# EAGLE board HITB_PEK_2018_V1.2 (EAGLE 9.2.1)
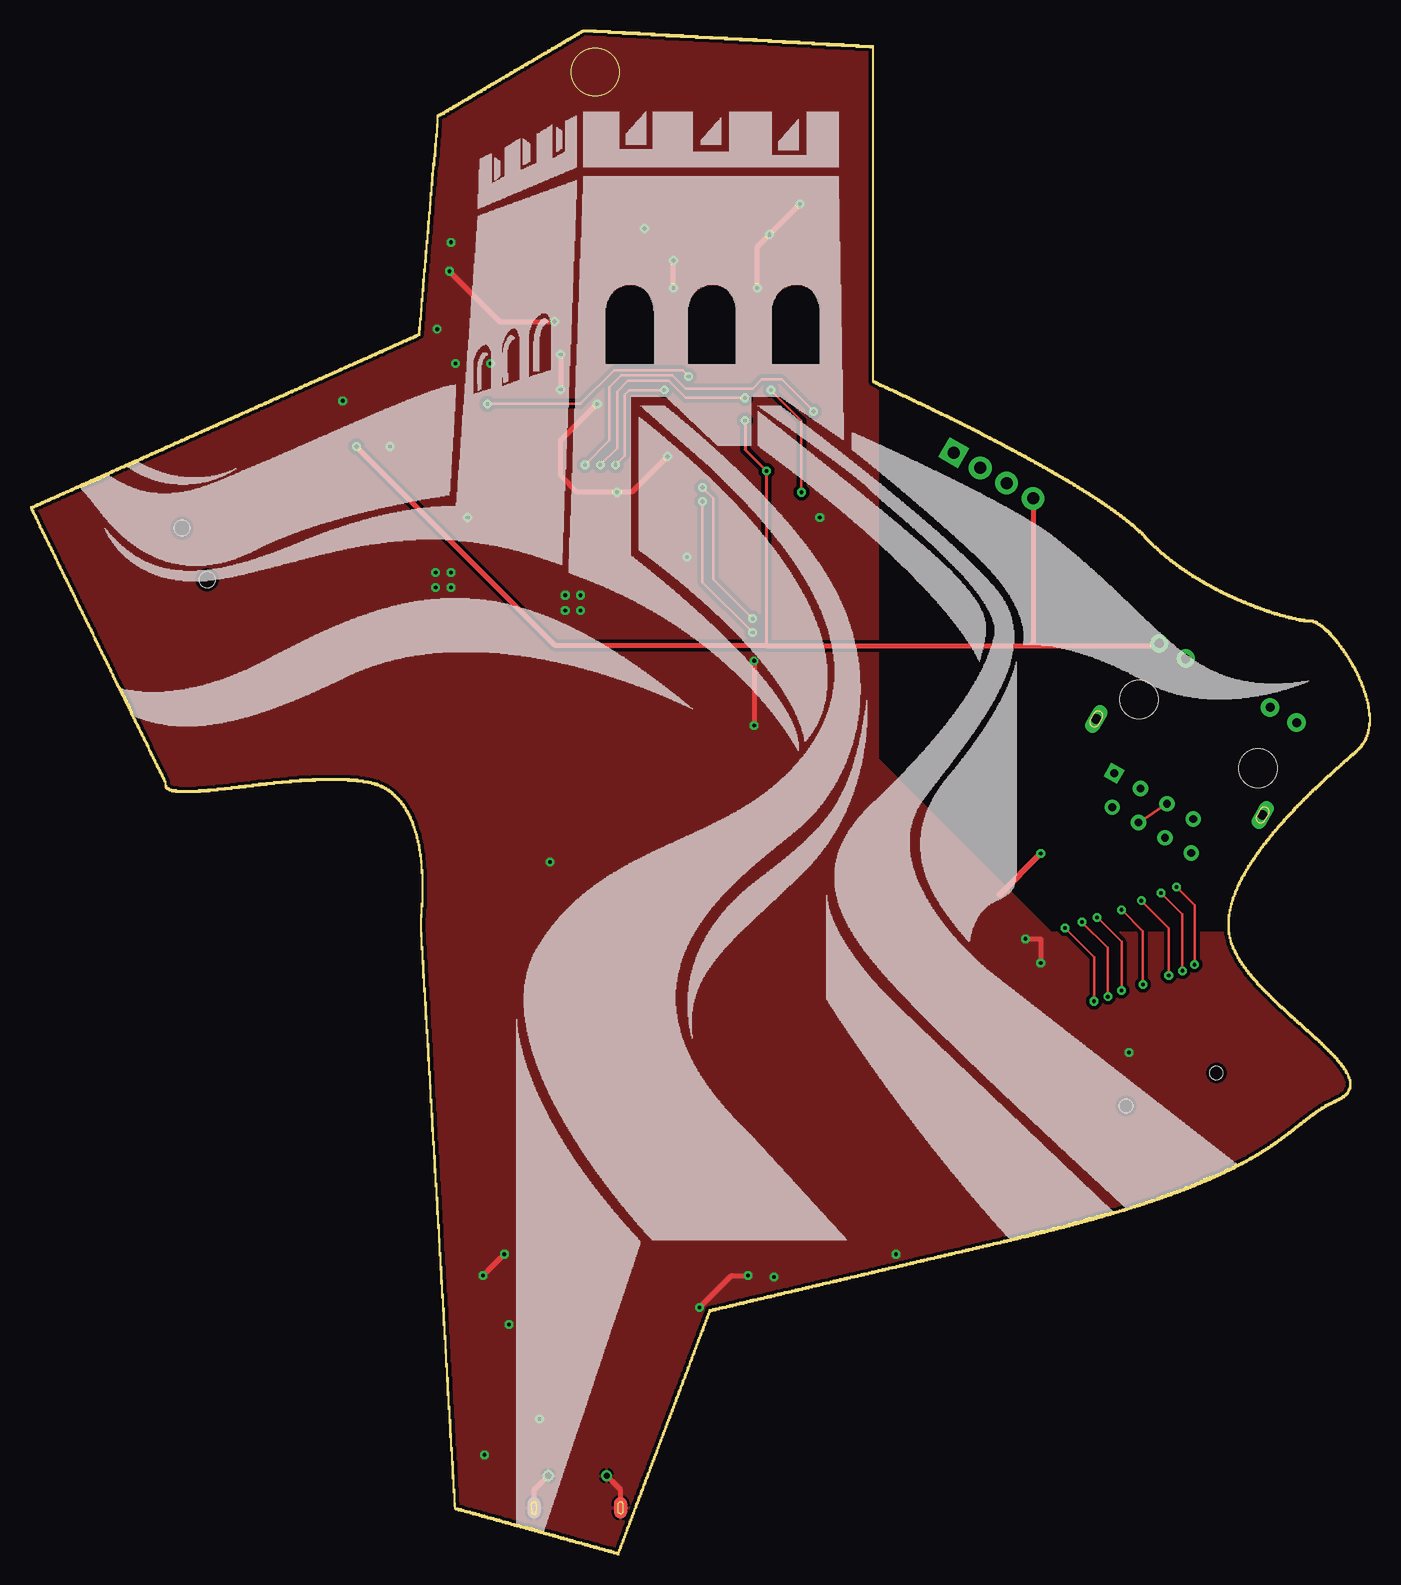
[diagram p0: board, top side]
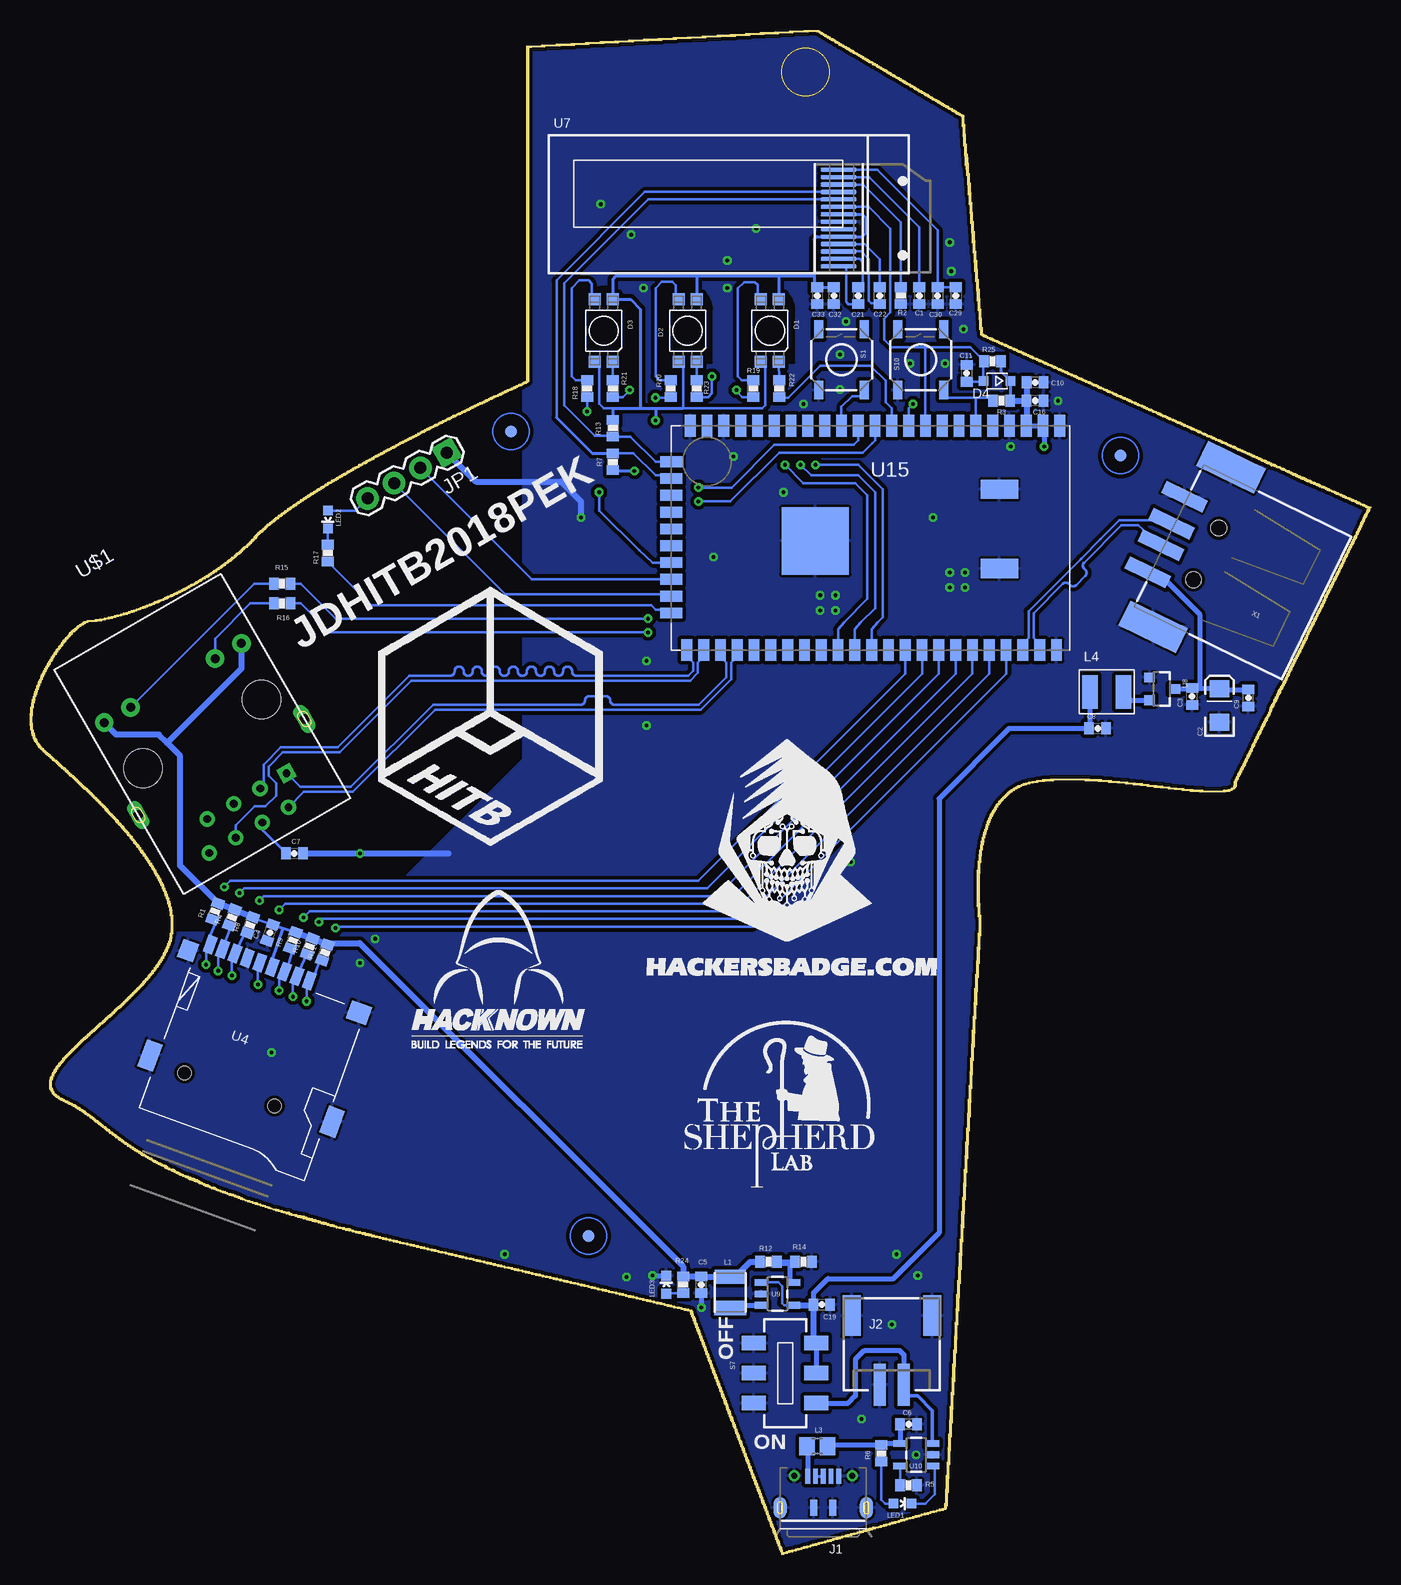
[diagram p1: board, bottom side, seen from below]

Size 111.72 x 127.05 mm. Coordinates in mm from the lower left corner, seen from the top.
Copper layers (1*16): Top 0.035mm / dielectric 1.5mm / Bottom 0.035mm
Design rules "yun": minimum track width 6mil, minimum drill 12mil, track to track 6mil, track to pad 6mil, pad to pad 6mil, via to via 6mil, smd to smd 6mil, copper to edge 10mil, drill to drill 6mil, minimum pad ring 8mil, minimum via ring 8mil, stop-mask expansion 4mil, vias tented up to drill 20mil, thermal gap 8mil
Net classes: 0 default: width 0.203 mm, clearance 0.203 mm; 1 3.3V: width 0.254 mm
Milling: area 45.1,121.5 to 49.1,125.5

## Footprints (pad centres in the part's own frame; a part is rotated, then mirrored left to right if it is on the bottom)
0603-CAP = smd 0.8 x 1: 1 -0.7,0; 2 0.7,0
EIA3216 = smd 1.4 x 1.6: A 1.4,0; C -1.4,0
LSG-T770 = smd 1 x 1: 1 0.75,-2.6; 2 0.75,2.6; 3 -0.75,2.6; 4 -0.75,-2.6
SOD-323F = smd 0.8 x 0.8: A 1.125,0; C -1.125,0
USB-MICRO-4 = smd 0.4 x 1.25: DM- 0.65,-1.835; DP+ 0,-1.835; GND -1.3,-1.835; ID -0.65,-1.835; VBUS 1.3,-1.835 | smd 0.6 x 1.35: MT1 0.8,0.815; MT2 -0.8,0.815 | smd 1.1 x 1.8: MT5 3.6,0.815; MT6 -3.6,0.815 | smd 1.1 x 1.8 bottom: MT7 -3.6,0.815; MT8 3.6,0.815 | drill 0.5: MT9 -2.425,-1.86; MT10 2.425,-1.86
PH2.0_SMD_2 = smd 1 x 3.5: 1 -1,-4; 2 1,-4 | smd 1.5 x 3.4: G1 -3.35,1.75; G2 3.35,1.75
1X04 = drill 1 pad 1.88 square: 1 0,0 | drill 1 pad 1.88: 2 2.54,0; 3 5.08,0; 4 7.62,0
1210 = smd 1.2 x 2.7: 1 -1.3,0 | smd 1.2 x 2.6: 2 1.3,0
FB805 = smd 1.3 x 1.5: 1 -0.85,0; 2 0.85,0
CD32 = smd 1.27 x 2.8: P$1 -1.4,0; P$2 1.4,0
LED-0603 = smd 0.8 x 0.8: A 0,-0.75; C 0,0.75
0603-RES = smd 0.8 x 1: 1 -0.7,0; 2 0.7,0
TACTILE_SWITCH_SMD = smd 1.524 x 0.762: 1 -2.54,1.905; 2 2.54,1.905; 3 -2.54,-1.905; 4 2.54,-1.905
MSS22D18 = smd 1.2 x 2: 1 -2.5,2.6; 2 0,2.6; 3 2.5,2.6; 4 -2.5,-2.6; 5 0,-2.6; 6 2.5,-2.6
FIDUCIA-MOUNT = smd 1.016 x 1.016: P$1 0,0
MICRO-SD-TF = smd 0.8 x 1.5: CD -6.72,4.61; CD/DAT3 0.98,4.61; CLK -2.32,4.61; CMD -0.12,4.61; DAT0 -4.52,4.61; DAT1 -5.62,4.62; DAT2 2.08,4.61; GND -3.42,4.61; VDD -1.22,4.61 | smd 1.4 x 1.6: GND1 -8.27,3.51 | smd 1.8 x 1.6: GND2 6.88,3.51 | smd 1.4 x 2.4: GND3 7.88,-5.79; GND4 -8.27,-5.79 | hole 1.1: 2.93,-6.19; -5.07,-6.19
OLED_12832_0.91_2 = smd 3 x 0.35: 1 9.15,-5.18; 2 9.15,-4.56; 3 9.15,-3.94; 4 9.15,-3.32; 5 9.15,-2.7; 6 9.15,-2.08; 7 9.15,-1.46; 8 9.15,-0.84; 9 9.15,-0.22; 10 9.15,0.4; 11 9.15,1.02; 12 9.15,1.64; 13 9.15,2.26; 14 9.15,2.88
SOT23-3 = smd 0.8 x 0.9: 1 -0.95,-1; 2 0.95,-1; 3 0,1.1
SOT23-5 = smd 1.1 x 0.55: 1 -1.35,0.95; 2 -1.35,0; 3 -1.35,-0.95; 4 1.35,-0.95; 5 1.35,0.95
MT7688_HLINK = smd 0.9 x 1.8: 1 15.78,9.35; 2 14.38,9.35; 3 12.98,9.35; 4 11.58,9.35; 5 10.18,9.35; 6 8.78,9.35; 7 7.38,9.35; 8 5.98,9.35; 9 4.58,9.35; 10 3.18,9.35; 11 1.78,9.35; 12 0.38,9.35; 13 -1.02,9.35; 14 -2.42,9.35; 15 -3.82,9.35; 16 -5.22,9.35; 17 -6.62,9.35; 18 -8.02,9.35; 19 -9.42,9.35; 20 -10.82,9.35; 21 -12.22,9.35; 22 -13.62,9.35; 23 -15.02,9.35; 34 -15.3,-9.35; 35 -13.9,-9.35; 36 -12.5,-9.35; 37 -11.1,-9.35; 38 -9.7,-9.35; 39 -8.3,-9.35; 40 -6.9,-9.35; 41 -5.5,-9.35; 42 -4.1,-9.35; 43 -2.7,-9.35; 44 -1.3,-9.35; 45 0.1,-9.35; 46 1.5,-9.35; 47 2.9,-9.35; 48 4.3,-9.35; 49 5.7,-9.35; 50 7.1,-9.35; 51 8.5,-9.35; 52 9.9,-9.35; 53 11.3,-9.35; 54 12.7,-9.35; 55 14.1,-9.35; 56 15.5,-9.35 | smd 1.8 x 0.9: 24 -16.6,6.35; 25 -16.6,4.95; 26 -16.6,3.55; 27 -16.6,2.15; 28 -16.6,0.75; 29 -16.6,-0.65; 30 -16.6,-2.05; 31 -16.6,-3.45; 32 -16.6,-4.85; 33 -16.6,-6.25 | smd 5.6 x 5.6: PAD -4.6,-0.25 | smd 3.1 x 1.6: PAD1 10.75,4.05; PAD2 10.75,-2.55
HR911105A = drill 0.65 pad 1.27 square: 1 4.445,-17.145 | drill 0.65 pad 1.27: 2 3.175,-19.685; 3 1.905,-17.145; 4 0.635,-19.685; 5 -0.635,-17.145; 6 -1.905,-19.685; 7 -3.175,-17.145; 8 -4.445,-19.685 | drill 0.75 pad 1.524: 9 6.604,-5.893; 10 4.064,-5.893; 11 -4.064,-5.893; 12 -6.604,-5.893 | drill 0.8 pad 1.27 long: 13 8.001,-13.97; 14 -8.001,-13.97 | hole 3.2: 5.715,-10.795; -5.715,-10.795
USB-A-6 = smd 1.1 x 3.8: DM- -1,2.4; DP+ 1,2.4; GND 3.5,2.4; VBUS -3.5,2.4 | smd 2.3 x 5.3: P$1 -7.4,0; P$2 7.4,0 | hole 1.3: -2.4,-1.3; 2.4,-1.3

## Placement (x,y rotation side)
C1  2.2uF  [0603-CAP]  37.62,104.91 270 bottom
C2  10uF  [EIA3216]  12.6,70.75 90 bottom
C3  0.1uF  [0603-CAP]  14.89,71.51 90 bottom
C4  0.1uF  [0603-CAP]  91.72,51.83 70 bottom
C5  10uF  [0603-CAP]  55.78,22.49 90 bottom
C6  1uF  [0603-CAP]  38.51,10.86 180 bottom
C7  0.1uF  [0603-CAP]  89.69,58.43 0 bottom
C8  10uF  [0603-CAP]  22.76,68.84 0 bottom
C9  0.1uF  [0603-CAP]  10.19,71.38 90 bottom
C10  1uF  [0603-CAP]  27.97,97.68 180 bottom
C11  4.7uF  [0603-CAP]  33.68,98.43 270 bottom
C16  0.1uF  [0603-CAP]  27.97,96.15 180 bottom
C19  1uF  [0603-CAP]  45.75,20.84 0 bottom
C21  1uF  [0603-CAP]  42.7,104.91 270 bottom
C22  1uF  [0603-CAP]  40.92,104.91 90 bottom
C29  0.1uF  [0603-CAP]  34.57,104.91 270 bottom
C30  4.7uF  [0603-CAP]  36.09,104.91 270 bottom
C32  0.47uF  [0603-CAP]  44.73,104.91 270 bottom
C33  1uF  [0603-CAP]  46.13,104.91 270 bottom
D1  LSG-T770  [LSG-T770]  50.06,101.99 0 bottom
D2  LSG-T770  [LSG-T770]  56.92,101.99 0 bottom
D3  LSG-T770  [LSG-T770]  63.91,101.99 0 bottom
D4  1N4148  [SOD-323F]  31.14,97.8 180 bottom
J1  USB_5_MICRO_4  [USB-MICRO-4]  45.62,4.71 180 bottom
J2  M02_G_PH2.0  [PH2.0_SMD_2]  39.91,18.17 0 bottom
JP1  [1X04]  76.99,91.83 210 bottom
L1  NRH3012  [1210]  53.37,21.85 90 bottom
L3  1A  [FB805]  46.13,9.03 180 bottom
L4  CD32 10uH  [CD32]  22,71.89 0 bottom
LED1  [LED-0603]  39.02,4.25 270 bottom
LED2  [LED-0603]  86.89,86.24 180 bottom
LED3  [LED-0603]  58.7,22.49 0 bottom
R1  10k  [0603-RES]  96.29,53.6 70 bottom
R2  560K  [0603-RES]  39.14,104.91 90 bottom
R3  10k  [0603-RES]  30.76,96.15 180 bottom
R4  10k  [0603-RES]  94.9,53.09 70 bottom
R5  1.5k  [0603-RES]  38.51,5.78 180 bottom
R6  1k  [0603-RES]  40.79,8.44 90 bottom
R7  4k7  [0603-RES]  63.15,91.07 90 bottom
R8  10k  [0603-RES]  93.37,52.46 70 bottom
R9  10k  [0603-RES]  89.82,51.19 70 bottom
R10  10k  [0603-RES]  88.42,50.68 70 bottom
R11  10k  [0603-RES]  87.15,50.17 70 bottom
R12  15K 1%  [0603-RES]  50.19,24.39 0 bottom
R13  4k7  [0603-RES]  63.15,93.86 270 bottom
R14  3.3K 1%  [0603-RES]  47.27,24.39 0 bottom
R15  1k  [0603-RES]  90.7,80.91 180 bottom
R16  1k  [0603-RES]  90.7,79.26 180 bottom
R17  330R  [0603-RES]  86.89,83.45 90 bottom
R18  330R  [0603-RES]  65.31,97.16 90 bottom
R19  330R  [0603-RES]  51.46,97.16 90 bottom
R20  330R  [0603-RES]  58.32,97.16 90 bottom
R21  330R  [0603-RES]  63.15,97.16 270 bottom
R22  330R  [0603-RES]  49.3,97.16 270 bottom
R23  330R  [0603-RES]  56.16,97.16 270 bottom
R24  330R  [0603-RES]  57.3,22.49 90 bottom
R25  4k7  [0603-RES]  31.52,99.45 180 bottom
S1  SWITCH_2SMD  [TACTILE_SWITCH_SMD]  44.1,99.58 90 bottom
S7  SWITCH-DPDT  [MSS22D18]  48.8,15.12 270 bottom
S10  SWITCH_2SMD  [TACTILE_SWITCH_SMD]  37.49,99.58 90 bottom
U1  FIDUCIALMOUNT  [FIDUCIA-MOUNT]  71.66,93.61 0 bottom
U2  FIDUCIALMOUNT  [FIDUCIA-MOUNT]  65.18,26.55 0 bottom
U3  FIDUCIALMOUNT  [FIDUCIA-MOUNT]  20.85,91.58 0 bottom
U4  TF_CARD  [MICRO-SD-TF]  91.97,44.21 340 bottom
U5  LOGO_BADGE_243_20_S  [LOGO_BADGE_243_20_S]  60.35,48.27 0 bottom
U6  LOGO_MZ_16_14_S  [LOGO_MZ_16_14_S]  57.18,30.62 0 bottom
U7  OLED_12832_I2C_2  [OLED_12832_0.91_2]  53.49,112.53 0 bottom
U8  XT1861B502MR  [SOT23-3]  17.43,72.14 270 bottom
U9  SY8009AAAC  [SOT23-5]  49.43,21.73 0 bottom
U10  ME4074  [SOT23-5]  37.87,8.32 180 bottom
U11  LOGO_HACKNOWN_14.4_13.2_S  [LOGO_HACKNOWN_14.4_13.2_S]  79.91,42.17 0 bottom
U13  LOGO_HITB_216_187_S  [LOGO_HITB_216_187_S]  82.7,59.06 0 bottom
U15  MT7688-HLINK  [MT7688_HLINK]  41.68,84.72 0 bottom
U$1  HR911105A  [HR911105A]  102.77,77.73 30 bottom
X1  USB_4_6  [USB-A-6]  14.89,83.96 64 bottom

## Library data of the parts
C1-C11 C16 C19 C21 C22 C29 C30 C32 C33 D1-D4 J1 J2 JP1 L1 L3 L4 LED1-LED3 R1-R25 S1 S10 U1-U11 U13 U15 U$1 X1 = 2SparkFun
S7 = 0SparkFun

## Nets
3.3V: C4.2 C5.2 C10.2 C16.2 C32.1 C33.1 D1.2 D1.4 D2.2 D2.4 D3.2 D3.4 D4.C JP1.4 L1.2 LED2.A R1.2 R3.1 R4.2 R7.1 R8.2 R9.2 R10.2 R11.2 R12.1 R13.1 R24.2 R25.1 U4.VDD U7.5 U7.8 U15.2 U15.3 U$1.9 U$1.12
5V: C6.2 L3.1 R6.2 U10.4
12: U15.42
GND: C1.2 C2.C C3.1 C4.1 C5.1 C6.1 C7.2 C8.2 C9.1 C10.1 C11.1 C16.1 C19.2 C29.2 C30.2 C32.2 C33.2 J1.GND J1.MT1 J1.MT2 J1.MT5 J1.MT6 J1.MT7 J1.MT8 J1.MT9 J1.MT10 J2.1 J2.G1 J2.G2 JP1.1 LED3.C R2.1 R5.1 R14.2 S1.1 S7.4 S7.5 S7.6 S10.1 U4.GND U4.GND1 U4.GND2 U4.GND3 U4.GND4 U7.7 U8.1 U9.2 U10.2 U15.1 U15.4 U15.21 U15.23 U15.56 U15.PAD U15.PAD1 U15.PAD2 X1.GND X1.P$1 X1.P$2
GPIO42: R16.1 U15.12
GPIO43: R15.1 U15.13
I2C_SCL: R13.2 U7.10 U15.24
I2C_SDA: R7.2 U7.11 U15.25
LCD_RST: C11.2 D4.A R25.2 U7.9 U15.9
LED1: R21.2 U15.30
LED2: R22.2 U15.11
LED3: R23.2 U15.10
LED4: R18.1 U15.45
LED5: R19.1 U15.43
LED6: R20.1 U15.44
N$1: L4.P$2 U8.2
N$2: LED3.A R24.1
N$3: J2.2 S7.3 U10.3
N$4: C1.1 U7.13
N$7: R5.2 U10.5
N$8: R11.1 U4.DAT2 U15.53
N$9: R10.1 U4.CD/DAT3 U15.52
N$10: LED1.A R6.1
N$11: LED1.C U10.1
N$12: J1.VBUS L3.2
N$13: R9.1 U4.CMD U15.51
N$14: U4.CLK U15.50
N$15: R1.1 U4.CD U15.47
N$16: C21.2 U7.1
N$17: C21.1 U7.2
N$18: C22.1 U7.3
N$19: C22.2 U7.4
N$20: R8.1 U4.DAT0 U15.49
N$21: C29.1 C30.1 U7.14
N$22: R2.2 U7.12
N$23: R4.1 U4.DAT1 U15.48
N$24: L1.1 U9.3
N$25: R12.2 R14.1 U9.5
N$30: C7.1 U$1.4 U$1.5
N$31: R15.2 U$1.11
N$32: R16.2 U$1.10
N$33: LED2.C R17.2
N$35: R17.1 U15.33
N$36: D3.3 R18.2
N$37: U15.46
N$38: D1.3 R19.2
N$39: D2.3 R20.2
N$40: D3.1 R21.1
N$41: D1.1 R22.1
N$42: D2.1 R23.1
N$44: J1.DM- J1.DP+
R_N: U15.35 U$1.6
R_P: U15.34 U$1.3
RST: S1.3 U15.14
RST2: R3.2 S10.3 U15.6
RXD: JP1.3 U15.32
T_N: U15.37 U$1.2
T_P: U15.36 U$1.1
TXD: JP1.2 U15.31
USB_D_N: U15.55 X1.DM-
USB_D_P: U15.54 X1.DP+
VBAT: C8.1 C19.1 L4.P$1 S7.1 S7.2 U9.1 U9.4
VBUS: C2.A C3.2 C9.2 U8.3 X1.VBUS

## Tracks (layer width: path | path; a pad name or v marks a point on that pad's centre or on a via)
3.3V  (via drill 0.3)
  Top 0.254: v59.59,94.5 59.59,92.08 v61.37,90.31 61.37,75.75
  Top 0.406: v27.2,92.34 43.79,75.75 61.37,75.75 83.34,75.75 | 83.34,75.75 93.93,75.75 U$1.9 | JP1.4 83.59,76 83.34,75.75
  Bottom 0.203: 56.17,106.55 56.16,106.56 | 49.31,106.55 49.3,106.56 | D3.4 64.29,99.02 64.29,95.89 63.91,95.51 63.15,95.51 | D1.4 50.45,99.02 50.45,95.77 50.7,95.51 57.3,95.51 57.3,99.02 D2.4 | LED2.A 84.62,86.99 JP1.4 | R11.2 88.05,51.29 R10.2 R9.2 90.55,52.17 90.61,52.19 C4.2 93.01,52.99 R8.2 | 94.79,53.8 R4.2 | 93.42,53.24 R8.2 | R8.2 92.92,53.12 | U4.VDD 91.54,49.54
  Bottom 0.254: C33.1 C32.1 | U7.8 42.37,111.69 42.06,111.39 42.06,110.12 42.35,109.83 U7.5 46.16,109.83 46.38,109.61 46.38,106.56 | 46.13,105.74 C33.1 | 56.17,106.55 D2.2 | 49.31,106.55 D1.2 | 46.38,106.56 49.3,106.56 56.16,106.56 62.89,106.56 63.16,106.3 D3.2 61.68,104.59 60.86,103.77 60.86,95.51 | 46.38,106.56 46.38,105.86 C33.1 | 59.59,95.51 57.3,95.51 | 60.86,95.51 59.59,95.51 | 91.54,49.54 90.61,52.19 | C4.2 R9.2 | R13.1 63.15,95.51 60.86,95.51 | 59.59,95.51 v59.59,94.5 | v61.37,90.31 63.08,90.31 R7.1 | R25.1 30.82,98.61 D4.C 30.02,96.19 R3.1
  Bottom 0.305: C10.2 28.66,97.66
  Bottom 0.406: L1.2 52.96,23.15 | U15.3 U15.2 27.2,93.97 v27.2,92.34 27.2,92.21 | C16.2 28.58,96.06
  Bottom 0.508: 94.79,53.8 R1.2 99.21,57.42 99.21,66.56 100.29,67.64 | R4.2 93.42,53.24 | R9.2 88.05,51.29 | R10.2 R11.2 86.78,50.96 84.25,50.96 57.3,24.01 R24.2 C5.2 55.74,23.15 L1.2 | R12.1 51.72,24.39 52.96,23.15 | C10.2 C16.2 | C16.2 28.67,94.1 U15.3 | R3.1 C16.2 | 100.29,67.64 100.99,68.34 104.55,68.34 U$1.12 | U$1.9 94.1,73.83 100.29,67.64
5V
  Bottom 0.305: R6.2 40.67,9.27
  Bottom 0.406: 40.67,9.27 U10.4 39.21,9.28 C6.2 | R6.2 45.16,9.14 L3.1
GND  (via drill 0.3)
  Top 0.406: v84.23,49.29 84.23,51.32 v82.96,51.32 | v53.62,105.55 v53.62,107.83 | v64.16,112.53 v61.62,109.99 60.61,108.98 v60.61,105.55 | v34.95,106.94 39.14,102.75 v43.71,102.75 | v53.11,91.5 50.14,88.53 v48.92,88.53 45.62,88.53 44.22,89.92 44.22,92.85 v47.27,95.89 | v55.78,20.58 58.45,23.25 v59.84,23.25 | J1.MT7 42.02,5.39 J1.MT9 | J1.MT5 49.22,5.39 J1.MT10 | v44.22,100.01 v44.22,97.09 | v60.35,74.48 v60.35,69.1 | v37.75,23.25 v39.52,25.03
  Top 0.508: v84.23,58.43 80.8,55
  Bottom 0.406: v59.84,23.25 59.83,23.24 LED3.C | C5.1 v55.78,20.58
  Bottom 0.508: JP1.1 74.58,89.42 67.46,89.42 65.81,87.77 v65.81,86.42 | C7.2 v84.23,58.43 76.86,58.43
  other vias: 54.76,83.12 37.87,8.32 36.48,86.42 62,23.12 91.59,41.84 35.08,81.85 39.91,19.19 42.45,11.31 51.21,110.5 35.08,109.36 43.33,57.72 26.06,96.15 72.16,25.03 30,92.34 35.46,99.25 38.38,99.25 33.94,102.12 44.6,79.94 45.87,79.94 44.6,78.67 45.87,78.67 33.81,81.85 33.81,80.58 35.08,80.58
  pour Bottom (isolate 0.305, rank 2): -0.49,-3.17 111.88,-3.17 111.92,51.83 85.12,51.83 70.64,66.3 70.64,130.95 -0.56,130.95 -0.49,94.5
  pour Top (isolate 0.305, rank 2): -0.49,-3.17 111.88,-3.17 111.92,51.83 85.12,51.83 70.64,66.3 70.64,130.95 -0.56,130.95 -0.49,94.5
GPIO42  (via drill 0.3)
  Top 0.203: v56.03,87.77 56.03,81.03 v60.23,76.84
  Bottom 0.203: U15.12 41.3,92.86 41.55,92.59 42.32,91.83 49.3,91.83 53.37,87.77 v56.03,87.77 | v60.23,76.84 86.77,76.84 89.18,79.26 R16.1
GPIO43  (via drill 0.3)
  Top 0.203: v56.03,88.91 56.92,88.02 56.92,81.29 v60.23,77.99
  Bottom 0.203: U15.13 42.7,92.84 43.08,92.47 49.68,92.47 53.24,88.91 v56.03,88.91 | v60.23,77.99 86.26,77.99 89.18,80.91 R15.1
I2C_SCL
  Bottom 0.203: R13.2 62.95,93.35 | U7.10 60.21,112.93 67.21,105.93 67.21,95.77 64.67,93.23 63.21,93.23 | 63.42,93.43 63.21,93.23 | 63.21,93.23 R13.2 | R13.2 61.68,93.16 59.59,91.07 U15.24
I2C_SDA
  Bottom 0.203: U7.11 60.48,113.55 67.84,106.18 67.84,94.75 | R7.2 61.43,91.77 59.59,89.92 58.54,89.92 U15.25
  Bottom 0.254: 67.84,94.75 64.86,91.77 R7.2
LCD_RST
  Bottom 0.203: U7.9 41.84,112.31 40.03,110.5 40.03,103.51 40.54,103.01 40.54,101.23 39.91,100.59 37.11,100.59 | 37.11,94.19 36.98,94.19 U15.9 37.11,100.59 | C11.2 32.33,97.73 D4.A 32.27,99.41 R25.2 33.37,100.59 37.11,100.59
LED1  (via drill 0.3)
  Top 0.203: v61.75,97.04 64.29,94.5 v64.29,88.53
  Bottom 0.203: R21.2 62.32,96.46 v61.75,97.04 | U15.30 59.85,82.67 60.97,83.69 64.29,87 v64.29,88.53
LED2
  Bottom 0.203: R22.2 49.24,96.4 48.54,96.4 45.87,99.07 41.68,99.07 40.41,97.8 40.41,96.02 39.9,95.51 U15.11
LED3  (via drill 0.3)
  Top 0.203: v54.89,98.18 54.38,98.69 48.67,98.69 45.87,95.89 v38.13,95.89
  Bottom 0.203: 56.1,96.4 R23.2 55.21,96.46 54.89,96.78 v54.89,98.18 | U15.10 38.5,95.52 v38.13,95.89
LED4  (via drill 0.3)
  Top 0.203: v46.25,90.81 48.29,92.85 48.29,97.29 49.28,98.28 53.52,98.28 54.64,97.16 60.23,97.16 60.99,97.93 62.64,97.93 v65.31,95.26
  Bottom 0.203: R18.1 v65.31,95.26 | U15.45 41.58,77.11 41.08,77.7 40.67,78.11 40.67,88.78 42.7,90.81 v46.25,90.81
LED5  (via drill 0.3)
  Top 0.203: v52.86,97.04 49.94,97.04 49.56,96.66 49.56,91.58 v48.8,90.81
  Bottom 0.203: v52.86,97.04 52.86,96.97 52.35,96.46 R19.1 | v48.8,90.81 47.27,89.29 42.95,89.29 41.94,88.27 41.94,79.64 43.88,77.7 44.38,77.1 U15.43
LED6  (via drill 0.3)
  Top 0.203: v59.59,96.4 54.64,96.4 53.24,97.8 49.81,97.8 48.92,96.91 48.92,92.21 v47.52,90.81
  Bottom 0.203: R20.1 58.38,96.4 v59.59,96.4 | v47.52,90.81 46.64,89.92 42.7,89.92 41.3,88.53 41.3,78.88 42.48,77.7 42.98,77.11 U15.44
N$1
  Bottom 0.254: L4.P$2 20.6,71.26
  Bottom 0.406: 20.6,71.26 20.54,71.2 U8.2
N$2
  Bottom 0.203: R24.1 58.65,21.79 LED3.A
N$3
  Bottom 0.305: U10.3 36.52,11.99 37.75,13.22 38.76,13.22 38.91,13.36 J2.2
  Bottom 0.406: J2.2 38.91,16.66 39.27,17.03 42.19,17.03 42.95,16.27 42.95,13.22 43.55,12.62 S7.3
N$4
  Bottom 0.203: U7.13 41.78,114.79 37.62,110.63 C1.1
N$7
  Bottom 0.203: U10.5 39.22,5.79 R5.2
N$8  (via drill 0.3)
  Top 0.203: v86.26,52.21 88.67,49.79 v88.67,46.11
  Bottom 0.203: R11.1 87.66,49.29 88.07,48.12 U4.DAT2 88.67,47.6 v88.67,46.11 | U15.53 30.38,73.41 51.46,52.33 86.13,52.33 v86.26,52.21
N$9  (via drill 0.3)
  Top 0.203: v87.66,52.71 89.82,50.55 v89.82,46.49
  Bottom 0.203: R10.1 U4.CD/DAT3 89.82,47.86 v89.82,46.49 | U15.52 31.78,73.41 52.22,52.97 87.4,52.97 v87.66,52.71
N$10
  Bottom 0.203: R6.1 40.79,4.58 40.46,4.25 LED1.A
N$11
  Bottom 0.203: U10.1 36.35,7.37 36.35,5.01 37.11,4.25 LED1.C
N$12
  Bottom 0.406: J1.VBUS 46.92,8.81 L3.2
N$13  (via drill 0.3)
  Top 0.203: v88.93,53.09 90.96,51.06 v90.96,47
  Bottom 0.203: R9.1 89.82,50.3 90.32,48.77 U4.CMD 90.96,48.13 v90.96,47 | v88.93,53.09 88.42,53.6 52.99,53.6 33.18,73.41 U15.51
N$14  (via drill 0.3)
  Top 0.203: v90.96,53.73 92.74,51.95 v92.74,47.51
  Bottom 0.203: v90.96,53.73 90.45,54.24 53.75,54.24 34.58,73.4 U15.50 | U4.CLK 92.74,49.17 v92.74,47.51
N$15  (via drill 0.3)
  Top 0.203: v95.53,55.64 97.05,54.11 v97.05,49.16
  Bottom 0.203: R1.1 96.29,52.59 96.8,51.41 U4.CD 97.05,50.49 v97.05,49.16 | v95.53,55.64 95.02,56.14 56.03,56.14 38.78,73.39 U15.47
N$16
  Bottom 0.203: C21.2 43.52,104.21 43.71,104.4 43.71,107.32 44.32,107.32 U7.1
N$17
  Bottom 0.203: U7.2 42.58,107.97 42.32,107.7 42.32,105.99 C21.1
N$18
  Bottom 0.203: U7.3 42.44,108.59 41.81,107.96 41.81,104.48 41.61,104.28 40.99,104.28 C22.1
N$19
  Bottom 0.203: U7.4 42.17,109.21 40.92,107.96 C22.2
N$20  (via drill 0.3)
  Top 0.203: v92.61,54.49 94.9,52.21 v94.9,48.27
  Bottom 0.203: R8.1 93.88,51.7 94.63,50.1 U4.DAT0 94.9,49.83 v94.9,48.27 | v92.61,54.49 92.23,54.87 54.51,54.87 35.98,73.4 U15.49
N$21
  Bottom 0.203: U7.14 41.13,115.41 36.09,110.37 C30.1 C29.1
N$22
  Bottom 0.203: U7.12 42.31,114.17 39.14,111.01 R2.2
N$23  (via drill 0.3)
  Top 0.203: v94.26,55.13 96.04,53.35 v96.04,48.65
  Bottom 0.203: R4.1 95.02,52.21 95.68,50.52 U4.DAT1 96.04,50.11 v96.04,48.65 | v94.26,55.13 93.88,55.51 55.27,55.51 37.38,73.4 U15.48
N$24
  Bottom 0.406: U9.3 53.14,20.78 L1.1
N$25
  Bottom 0.406: R12.2 R14.1 | U9.5 48.41,22.68 48.41,24.27 49.37,24.27
  Bottom 0.508: R12.2 49.37,24.27
N$30
  Top 0.203: U$1.4 U$1.5
  Bottom 0.254: U$1.4 92.38,60.42 C7.1
N$31
  Bottom 0.203: U$1.11 93.03,80.91 R15.2
N$32
  Bottom 0.203: U$1.10 96.3,76.33 93.37,79.26 R16.2
N$33
  Bottom 0.203: LED2.C R17.2
N$35
  Bottom 0.203: U15.33 58.56,78.75 59.59,78.75 59.97,79.13 83.28,79.13 R17.1
N$36
  Bottom 0.203: D3.3 64.91,104.84 64.91,105.92 65.18,106.18 65.94,106.18 66.58,105.55 66.58,98.18 66.26,97.86 R18.2
N$38
  Bottom 0.203: D1.3 51.08,104.86 51.08,105.8 51.31,106.03 52.22,106.03 52.73,105.52 52.73,98.18 52.42,97.86 R19.2
N$39
  Bottom 0.203: D2.3 57.93,104.84 57.93,105.79 58.19,106.05 59.08,106.05 59.59,105.55 59.59,98.18 59.27,97.86 R20.2
N$40
  Bottom 0.203: R21.1 D3.1
N$41
  Bottom 0.203: D1.1 R22.1
N$42
  Bottom 0.203: R23.1 56.16,99.38 D2.1
N$44
  Bottom 0.254: J1.DM- J1.DP+
NC
  cutout Top: 54.89,99.32 58.83,99.32 58.83,103.77 arc90 56.92,105.67 arc86 54.89,103.77
  cutout Top: 61.88,99.32 65.81,99.32 65.81,103.77 arc90 63.91,105.67 arc86 61.88,103.77
  cutout Top: 48.03,99.32 51.97,99.32 51.97,103.77 arc90 50.06,105.67 arc86 48.03,103.77
  cutout Bottom: 65.81,99.32 61.88,99.32 61.88,103.77 arc-90 63.78,105.67 arc-86 65.81,103.77
  cutout Bottom: 58.83,99.32 54.89,99.32 54.89,103.77 arc-90 56.8,105.67 arc-86 58.83,103.77
  cutout Bottom: 51.97,99.32 48.03,99.32 48.03,103.77 arc-90 49.94,105.67 arc-86 51.97,103.77
R_N
  Bottom 0.203: U15.35 55.58,74.81 56.06,74.33 56.06,73.48 56.71,72.83 79.95,72.83 85.92,66.86 90.65,66.86 91.85,65.67 91.85,64.91 91.21,64.27 91.21,63.26 92.1,62.37 92.99,62.37 94.58,60.78 U$1.6
R_P
  Bottom 0.203: U15.34 56.98,74.85 56.47,74.33 56.47,73.65 56.88,73.24 66.19,73.24 arc90 66.55,73.59 66.55,73.63 arc-90 66.91,73.99 66.95,73.99 arc-90 67.3,73.63 67.3,73.59 arc90 67.66,73.24 67.7,73.24 arc90 68.06,73.59 68.06,73.63 arc-90 68.41,73.99 68.45,73.99 arc-90 68.81,73.63 68.81,73.59 arc90 69.16,73.24 69.21,73.24 arc90 69.56,73.59 69.56,73.63 arc-90 69.92,73.99 69.96,73.99 arc-90 70.32,73.63 70.32,73.59 arc90 70.67,73.24 70.71,73.24 arc90 71.07,73.59 71.07,73.63 arc-90 71.42,73.99 71.47,73.99 arc-90 71.82,73.63 71.82,73.59 arc90 72.18,73.24 72.22,73.24 arc90 72.58,73.59 72.58,73.63 arc-90 72.93,73.99 72.97,73.99 arc-90 73.33,73.63 73.33,73.59 arc90 73.69,73.24 73.73,73.24 arc90 74.08,73.59 74.08,73.63 arc-90 74.44,73.99 74.48,73.99 arc-90 74.84,73.63 74.84,73.59 arc90 75.19,73.24 75.23,73.24 arc90 75.59,73.59 75.59,73.63 arc-90 75.94,73.99 75.99,73.99 arc-90 76.34,73.63 76.34,73.59 arc90 76.7,73.24 80.12,73.24 86.09,67.27 90.82,67.27 92.25,65.84 92.25,64.13 U$1.3
RST
  Bottom 0.203: U15.14 44.1,95.63 43.21,96.53 42.32,96.53 42.19,96.66 S1.3
RST2
  Bottom 0.203: S10.3 35.59,96.4 32.92,96.4 | 32.92,96.4 31.72,96.4 R3.2 | U15.6 32.9,96.39 32.92,96.4
RXD
  Bottom 0.203: U15.32 58.43,80.02 72.12,80.02 JP1.3
T_N
  Bottom 0.203: U15.37 52.78,74.8 52.79,74.81 53.29,74.3 53.29,72.95 55.82,70.42 77.96,70.42 84.82,63.56 88.89,63.56 U$1.2
T_P
  Bottom 0.203: U15.36 54.18,74.79 53.7,74.3 53.7,73.12 55.99,70.82 63.02,70.82 arc90 63.38,71.18 arc-90 63.73,71.53 65.12,71.53 arc-90 65.47,71.18 arc90 65.83,70.82 78.13,70.82 84.99,63.97 88.18,63.97 89.21,63.97 U$1.1
TXD
  Bottom 0.203: U15.31 69.9,81.27 JP1.2
USB_D_N
  Bottom 0.203: X1.DM- 19.36,85.78 20.77,85.78 23.89,82.67 arc-90 23.89,82.17 23.78,82.06 arc90 23.78,81.56 24.54,80.79 arc90 25.05,80.79 25.15,80.9 arc-90 25.66,80.9 28.09,78.46 28.09,76.41 27.58,75.9 U15.55
USB_D_P
  Bottom 0.203: X1.DP+ 16.69,86.19 20.94,86.19 22.52,84.61 24.13,83 24.17,82.96 28.5,78.63 28.5,76.41 28.98,75.93 U15.54
VBAT
  Bottom 0.203: U9.1 49.36,22.68 49.05,22.36 49.05,20.96 48.86,20.78 U9.4
  Bottom 0.406: S7.2 S7.1 46.45,17.88 C19.1 | C19.1 46.45,21.79 45.24,23 39.78,23 35.97,26.81 35.97,63 30.13,68.84 C8.1 23.4,68.91 L4.P$1 | 46.51,20.78 C19.1
  Bottom 0.508: U9.4 46.51,20.78 | C19.1 46.45,17.87 S7.1
VBUS
  Bottom 0.406: C9.2 12.54,72.08 C2.A 12.66,72.21 14.25,72.21 | 14.25,72.21 C3.2 14.95,72.14 U8.3 | X1.VBUS 17.75,81.86 14.25,78.37 14.25,72.21

## Text on the board
bPlace: JDHITB2018PEK | OFF | ON
bStop: HITB2018